# Altium PCB boots.PcbDoc
Units mm, origin at the board's own origin, x right, y up, seen from the top; angles counter-clockwise.
Board outline 40.01 x 37.08 mm, 2 copper layers (Top Layer, Bottom Layer); 14 components, 9 nets, 52 pads, 0 vias.
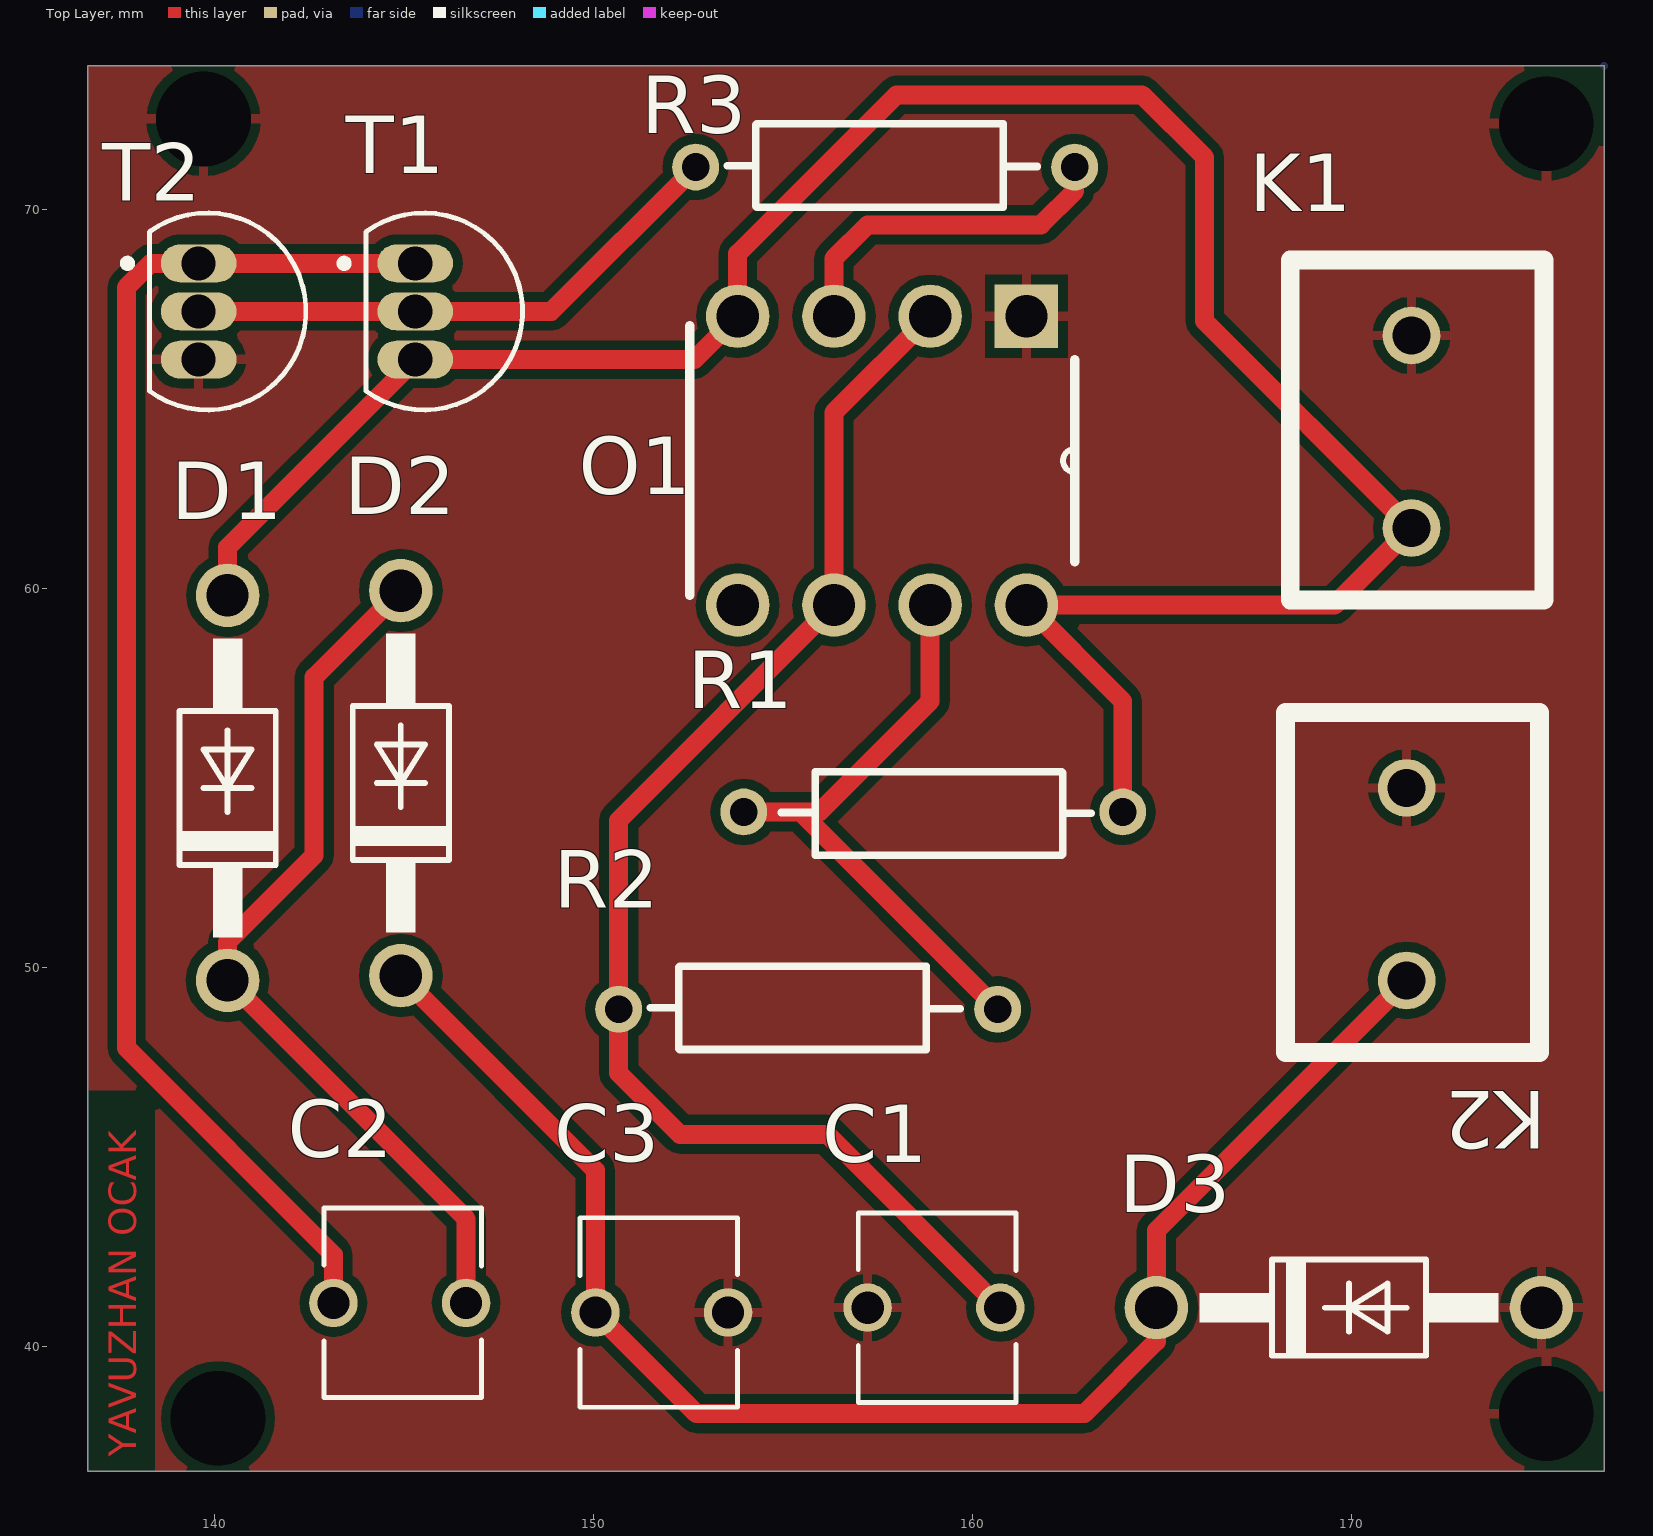
[diagram p0: Top Layer view]
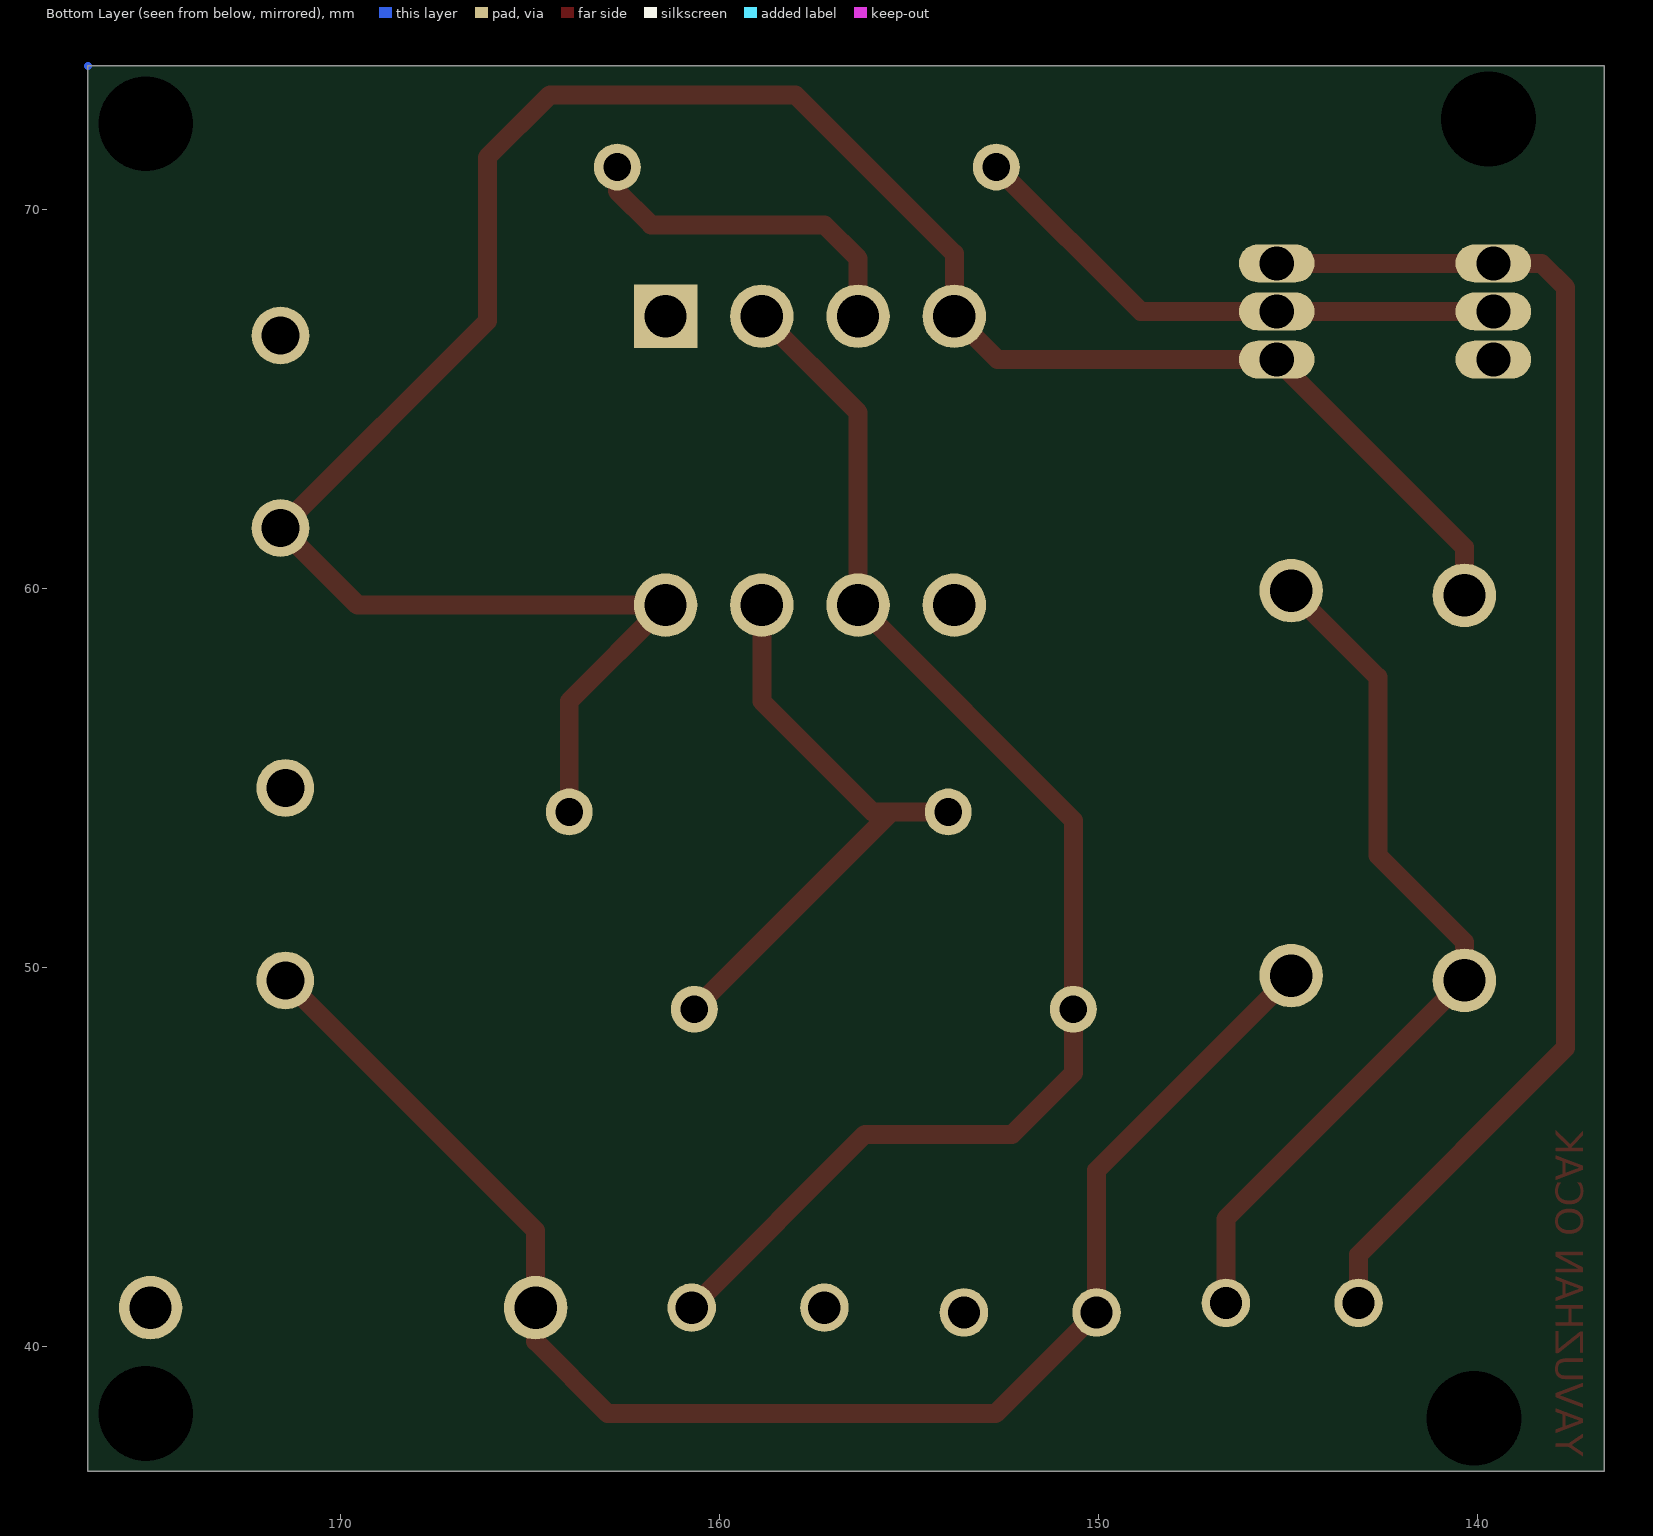
[diagram p1: Bottom Layer view, seen from below]
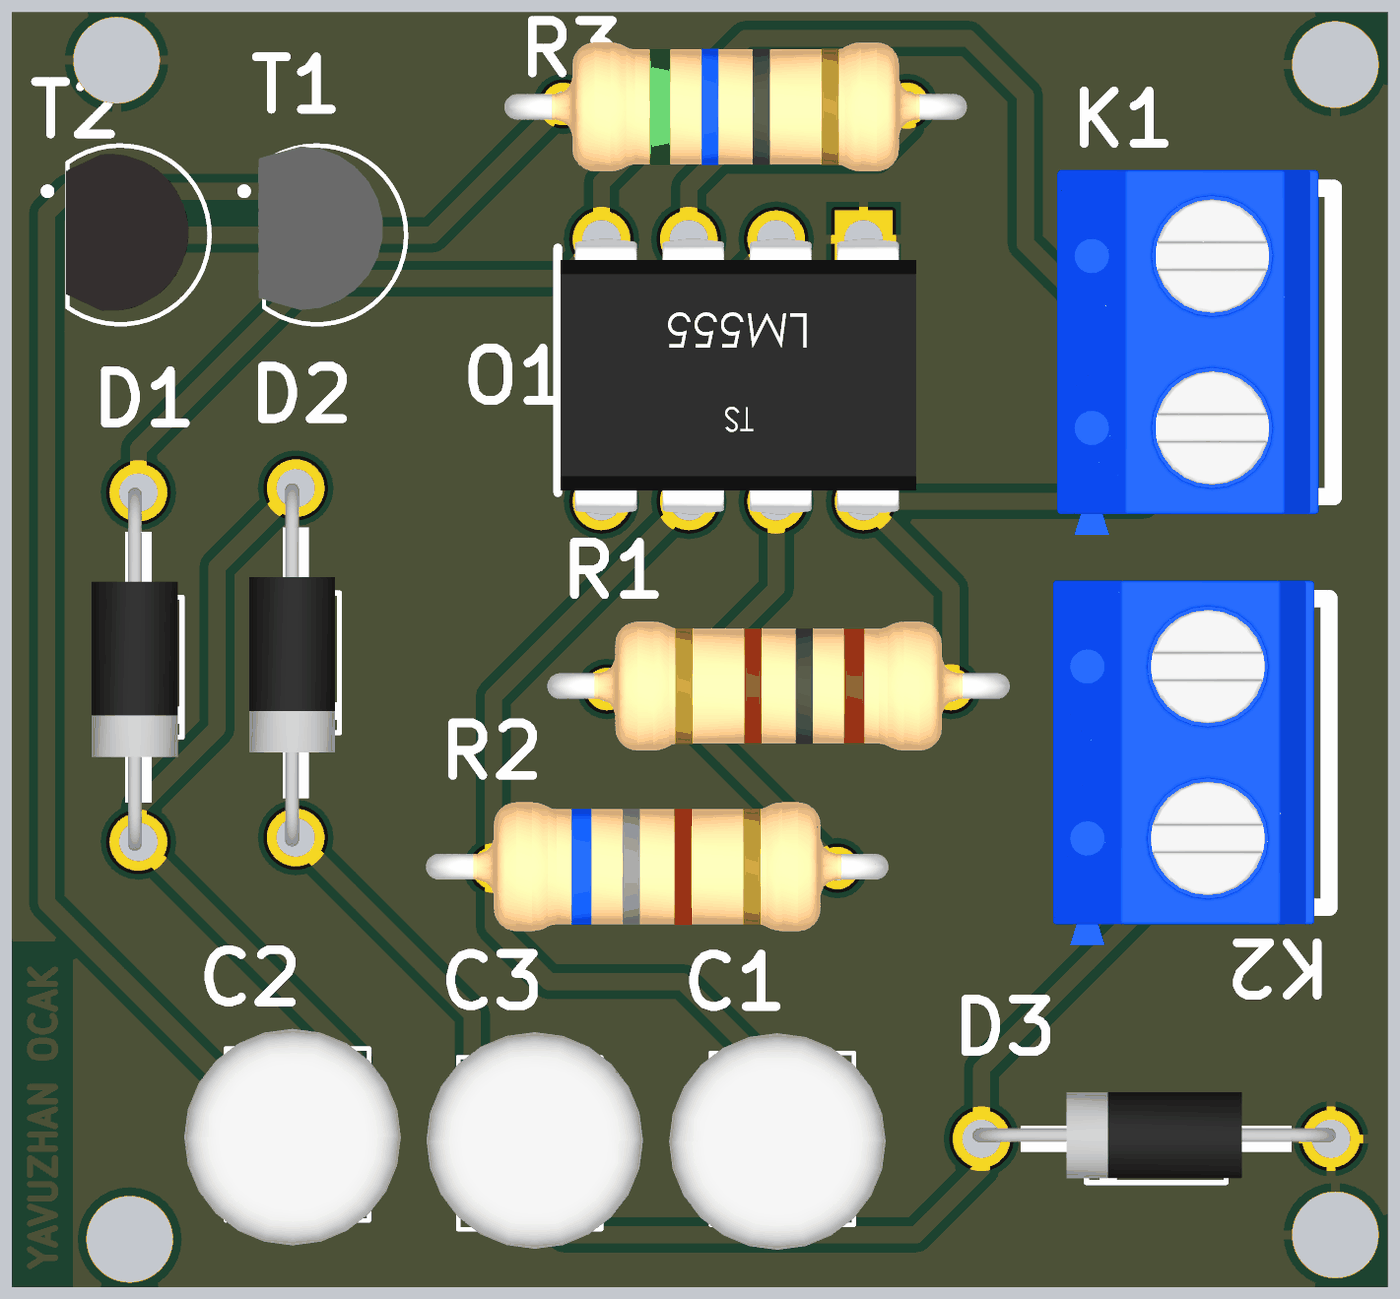
[diagram p2: 3D render of the assembled board from above, using the file's embedded part models]

## Layer stack, top to bottom
Top Solder: solder mask 0.0102, Solder Resist, Dk 3.5
Top Layer: signal copper 0.0356
Dielectric 1: dielectric 0.32, FR-4, Dk 4.8
Bottom Layer: signal copper 0.0356
Bottom Solder: solder mask 0.0102, Solder Resist, Dk 3.5

## Board outline
136.652,36.703 136.652,73.787 176.657,73.787 176.657,36.703

## Design rules (kind name [scope] priority, off if disabled: settings)
Clearance [All] p1: gap=0.254 ignorepadtopadclearanceinfootprint=FALSE except(0: Arc-Hole Track-Hole SMDPad-Hole THPad-Hole Via-Hole Fill-Hole Poly-Hole Region-Hole Text-Hole)
HoleSize [All] p1: absolutevalues=TRUE maxlimit=3.54 minlimit=0.025 maxpercent=80.000 minpercent=20.000
HoleToHoleClearance [All] p1: gap=0.5 allowstackedmicrovias=TRUE
PolygonConnect [All] p1: connectstyle=Relief reliefconductorwidth=0.254 reliefentries=4 polygonreliefangle="90 Angle" airgapwidth=0.254
RoutingVias [All] p1: holewidth=0.711 width=1.27 viastyle="Through Hole" minholewidth=0.711 minwidth=1.27 maxholewidth=0.711 maxwidth=1.27
SilkToSolderMaskClearance [IsPad] p1: minsilkscreentomaskgap=0.1 clearancetoexposedcopper=TRUE
SolderMaskExpansion [All] p1: expansion=0.102
Width [All] p1: maxlimit=0.5 minlimit=0.254 preferedwidth=0.254 minimp=50.000000 maximp=50.000000 favimp=50.000000
27 further rules are at their usual default settings.

## Components (designator, comment, footprint, x,y, rotation, side; value= is the part's Value field where it differs from the comment)
C1 "10 uf" "100 uf" 156.162,38.293 r0 top
C2 "47 uf" "100 uf" 142.065,38.42 r0 top
C3 "100 uf" "100 uf" 154.607,43.622 r180 top
D1 "1N4001" 1N4001 141.981,48.428 r90 top
D2 "1N4001" 1N4001 146.553,48.555 r90 top
D3 "1N4001" 1N4001 163.617,39.375 r0 top
K1 "klemens" klemens 175.027,58.945 r90 top
K2 "klemens" klemens 174.9,47.007 r90 top
O1 "555" 555 152.527,67.183 r270 top
R1 "100 ohm" "100 ohm" 153.945,54.063 r0 top
R2 "6.8 K" "6.8 k" 160.667,48.934 r180 top
R3 "56 ohm" "56 ohm" 162.699,71.159 r180 top
T1 "BC237" BC237 143.451,68.634 r270 top
T2 "BC307" BC307 137.736,68.634 r270 top

## Footprints (in the part's own frame and the unit in brackets; to place one, negate y for a bottom-side part, rotate by r counter-clockwise, add the part's x,y. Pads: shape width x height; smd on the part's side, far side on the other; paste and mask are expansions set on the pad)
1N4001 [mil]
  round 66 hole 44: A(448.39,64.8) C(48.39,64.8)
  silkscreen extent 93,15 403,115, body extent 38,20 454,118, height 98
"6.8 k" [mm]
  round 1.238 hole 0.73: 1(0.012,0.039) 1(0.012,0.039) 2(10.012,0.039)
  silkscreen extent 1,-1.1 9.18,1.1, body extent -1.47,-1.87 11.98,1.88, height 3.37
"56 ohm" [mm]
  round 1.238 hole 0.73: 1(0.012,0.039) 1(0.012,0.039) 2(10.012,0.039)
  silkscreen extent 1,-1.1 9.18,1.1, body extent -1.73,-1.75 11.73,2, height 3.37
"100 ohm" [mm]
  round 1.238 hole 0.73: 1(0.012,0.039) 1(0.012,0.039) 2(10.012,0.039)
  silkscreen extent 1,-1.1 9.18,1.1, body extent -1.73,-1.75 11.73,2, height 3.37
"100 uf" [mm]
  round 1.28 hole 0.85: 1(1.064,2.728) 1(1.064,2.728) 1(1.064,2.728) 1(1.064,2.728) 2(4.564,2.728)
  silkscreen extent 0.81,0.23 4.97,5.23, body extent -0.4,-0.5 5.9,5.8, height 11
555 [mil]
  rect 66x66 hole 44: 1(0,350)
  round 66 hole 44: 2(0,250) 3(0,150) 4(0,50) 5(300,50) 6(300,150) 7(300,250) 8(300,350)
  silkscreen extent 10,0 290,400, body extent -1,3 315,410, height 140
BC237 [mm]
  oval 1x2 hole 0.9: 1(0.054,1.837) 2(1.324,1.837) 3(2.594,1.837)
  silkscreen extent -1.28,-0.14 3.92,4.66, body extent -1.25,0.37 3.51,4, height 4.82
BC307 [mm]
  oval 1x2 hole 0.9: 1(0.054,1.837) 2(1.324,1.837) 3(2.594,1.837)
  silkscreen extent -1.28,-0.14 3.92,4.66, body extent -1.04,0.5 3.54,4.06, height 4.48
klemens [mm]
  round 1.524 hole 1: 1(2.65,3.45) 2(7.73,3.45)
  silkscreen extent 0.75,-0.05 9.72,6.65, body extent -0.35,0.38 10.25,7.98, height 10

## Part data
C1 C2: library part "100 uf"

## Free pads (board coordinates)
  round 0 hole 2.5: 3(175.133,72.263) 4(139.7,72.39) 4(140.081,38.1) 4(175.133,38.227)

## Nets (pads, with @x,y where several pads share a name; then routed paths per layer and width w, separated by ;. In a path a pad name is that pad's centre, name@x,y a point inside that pad or via, vN(x,y) a via of type N, cw(c..) or ccw(c..) an arc to the next point about the centre after c; other vN are vias at no path point)
GND: C1.1 C3.1 D3.A K1.2 K2.2 O1.1 pad.3 pad.4@139.7,72.39 pad.4@175.133,38.227 T2.3
NetC1_2: C1.2 O1.2 O1.6 R2.2 | length 36
  Top Layer w0.5: O1.2 156.337,64.643 O1.6 150.655,53.881 R2.2 150.655,47.211 152.273,45.593 156.154,45.593 C1.2
NetC2_1: C2.1 T1.1 T2.1 | length 36.9
  Top Layer w0.5: C2.1@143.129,41.148 143.129,42.418 137.668,47.879 137.668,67.945 138.303,68.58 T2.1 T1.1
NetC2_2: C2.2 D1.C D2.A | length 23.3
  Top Layer w0.5: D2.A 142.621,57.658 142.621,52.959 140.335,50.673 D1.C 146.629,43.363 C2.2
NetC3_2: C3.2 D2.C D3.C K2.1 | length 40
  Top Layer w0.5: D2.C 150.043,44.648 C3.2 152.71,38.227 162.941,38.227 164.846,40.132 D3.C 164.846,43.053 K2.1
NetD1_A: D1.A K1.1 O1.4 O1.8 R1.2 T1.3 | length 63.2
  Top Layer w0.5: D1.A 140.335,61.087 T1.3 152.654,66.04 O1.4 153.797,68.834 157.988,73.025 164.465,73.025 166.116,71.374 166.116,67.056 K1.1 169.545,59.563 O1.8 163.957,57.023 R1.2
NetO1_3: O1.3 R3.1 | length 9.2
  Top Layer w0.5: O1.3 156.337,68.707 157.226,69.596 161.798,69.596 162.687,70.485 R3.1@162.687,71.12
NetO1_7: O1.7 R1.1 R2.1 | length 16
  Top Layer w0.5: R1.1@153.957,54.102 155.448,54.102 ; O1.7 158.877,57.023 155.956,54.102 155.448,54.102 ; R2.1@160.655,48.895 155.448,54.102
NetR3_2: R3.2 T1.2 T2.2 | length 14.7
  Top Layer w0.5: T2.2 T1.2 148.877,67.31 R3.2
pads on no net: O1.5
copper on no net: | length 35.4
  Bottom Layer w0: 136.652,36.703 136.652,72.136

## Polygon pours and split planes (outlines as drawn)
GND on Top Layer "GND_L01_P006" (solid, pour order 6): 136.652,73.787 137.033,73.787 176.657,73.787 176.657,36.703 136.652,36.703

## Other copper
Top Layer:
  text "YAVUZHAN OCAK" at 137.922,37.084 h0.72 r90

## Dimensions
135.509,36.703 to 135.509,73.66 on Bottom Layer
136.779,74.93 to 176.784,74.803 on Bottom Layer